# EAGLE board quantum_AnalougeEngine_V5_0 (EAGLE 9.5.2), part 1 of 2
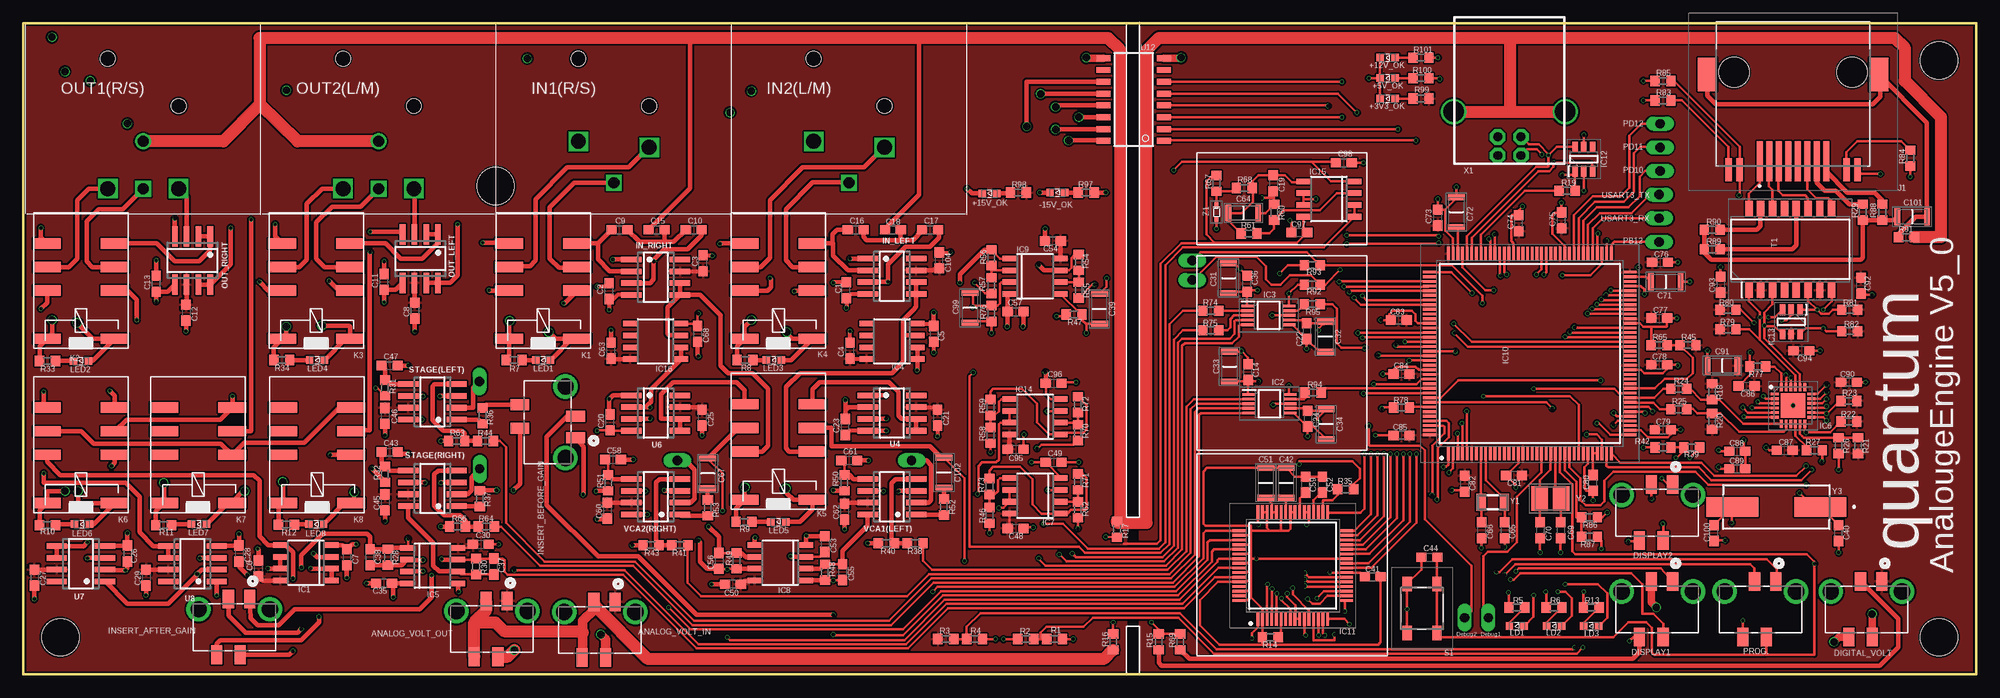
[diagram p0: board, top side]
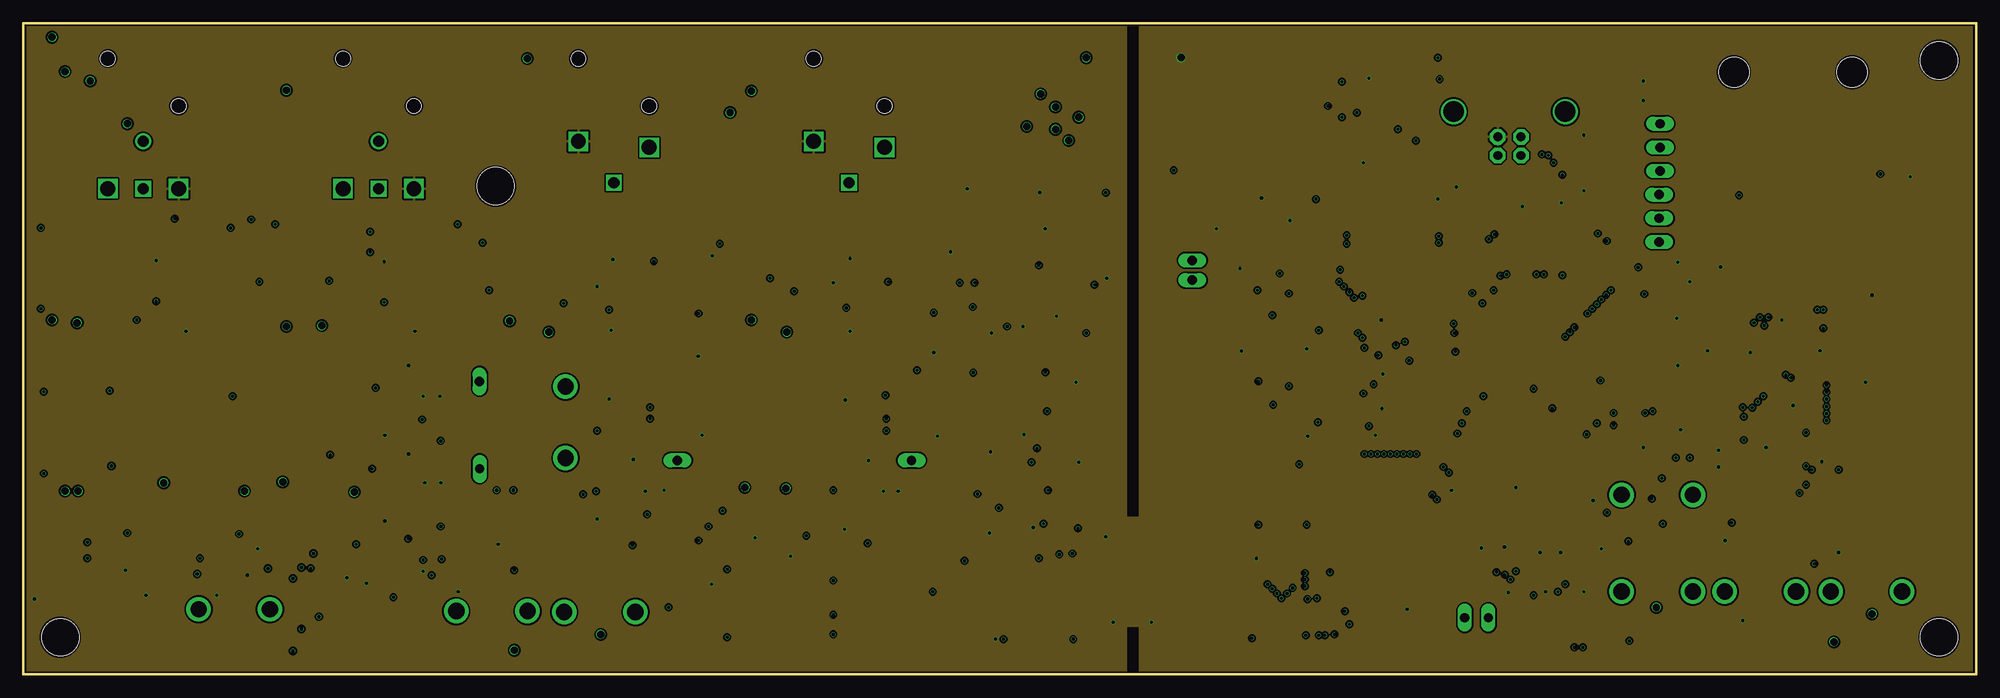
[diagram p1: board, inner layer midTop(AGND)]
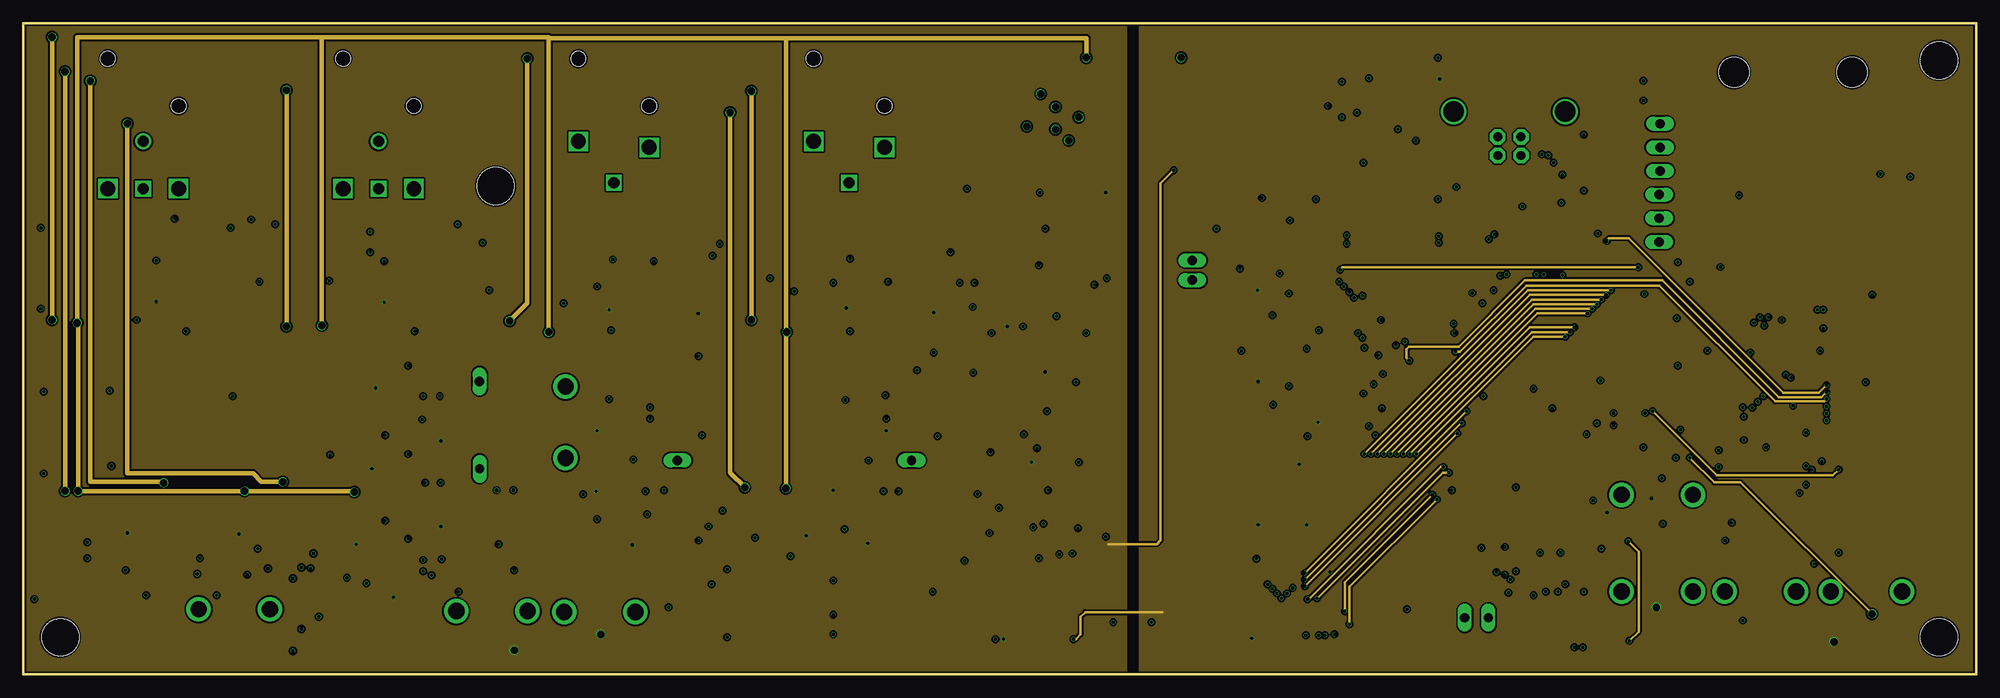
[diagram p2: board, inner layer midBottom(V-/+5V)]
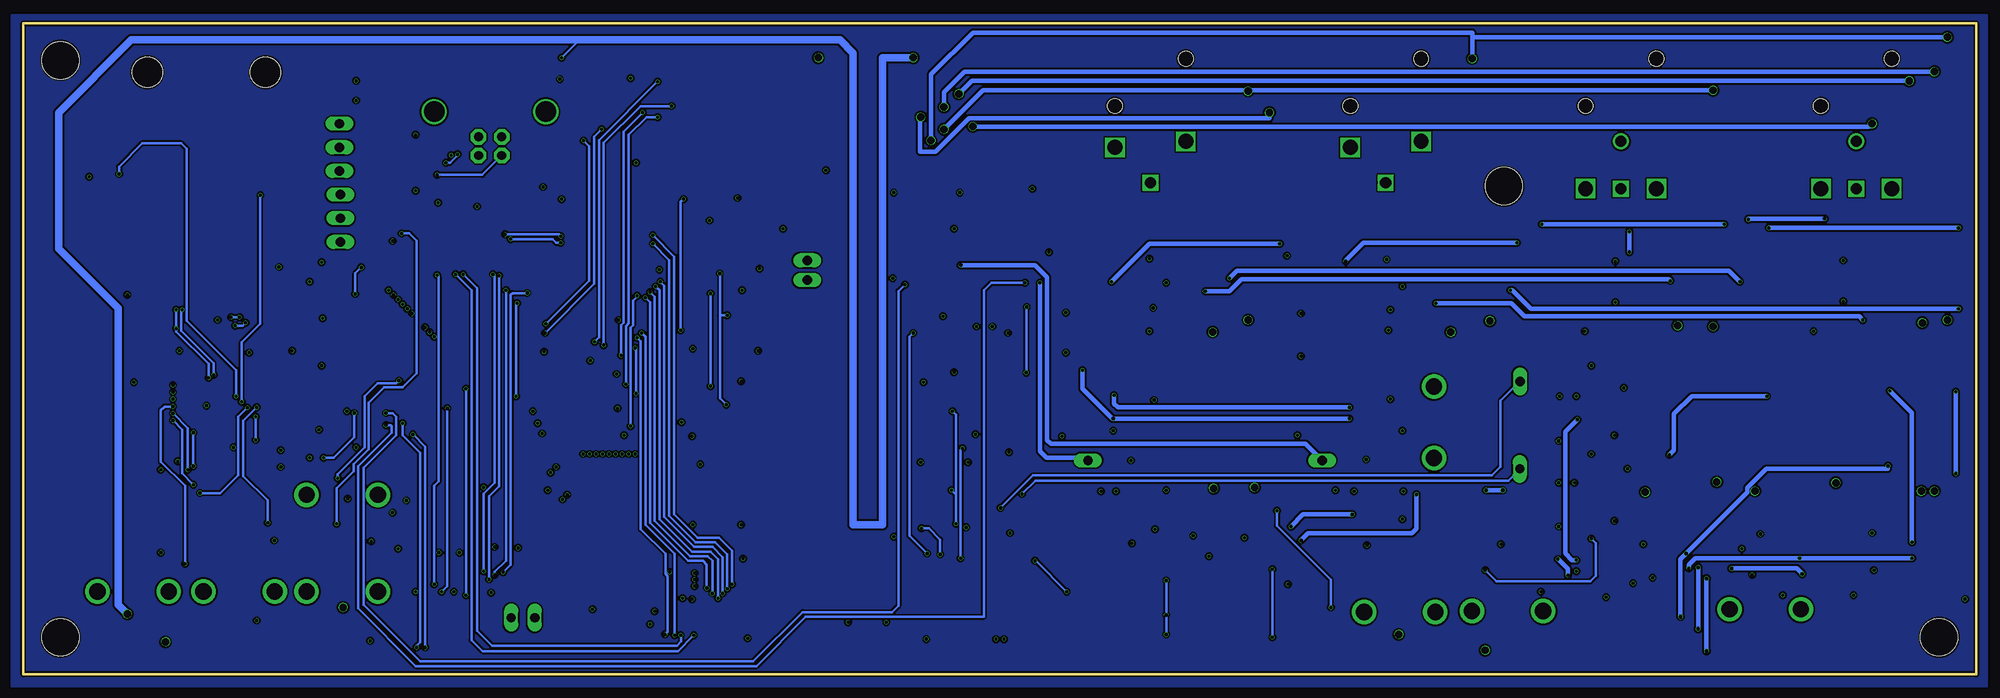
[diagram p3: board, bottom side, seen from below]

Size 210 x 70 mm. Coordinates in mm from the lower left corner, seen from the top.
Outline: 0,0 210,0 210,70 0,70 0,0
Copper layers (1*2+15*16): Top(V+/+3V3) 0.018mm / dielectric 0.362mm / midTop(AGND) 0.035mm / dielectric 0.71mm / midBottom(V-/+5V) 0.035mm / dielectric 0.362mm / Bottom 0.018mm
Design rules "4layer": minimum track width 0.2mm, minimum drill 0.2mm, track to track 0.2mm, track to pad 0.1mm, pad to pad 0.1mm, via to via 0.1mm, smd to smd 0.1mm, copper to edge 0.2mm, drill to drill 0.21mm, minimum pad ring 0.25mm, minimum via ring 0.05mm, stop-mask expansion 0.01mm, vias tented up to drill 0mil, thermal gap 10mil
Holes 4 mm at 206,66 50.8,52.5 4,4 206,4

## Footprints (pad centres in the part's own frame; a part is rotated, then mirrored left to right if it is on the bottom)
WL-SMCW_0603 = smd 0.8 x 0.8: 1 -0.8,0; 2 0.8,0
MOLEX_90814-0204 = smd 1.194 x 2.007: 1 0.254,0; 2 1.27,5.994; 3 2.54,0; 4 3.81,5.994 | drill 1.753 pad 2.629: 5 -1.93,1.092; 6 5.74,1.092
C0603 = smd 1.1 x 1: 1 -0.85,0; 2 0.85,0
C1206 = smd 0.62 x 1.82: 1 -1.6,0; 2 1.6,0
THT_PIN = drill 1 long: P$1 0,0
SOIC8 = smd 0.6 x 1.5: 1 -1.905,-2.75; 2 -0.635,-2.75; 3 0.635,-2.75; 4 1.905,-2.75; 5 1.905,2.75; 6 0.635,2.75; 7 -0.635,2.75; 8 -1.905,2.75
SOP50P490X110-10N = smd 1.4 x 0.3: 1 -2.2,1; 2 -2.2,0.5; 3 -2.2,0; 4 -2.2,-0.5; 5 -2.2,-1; 6 2.2,-1; 7 2.2,-0.5; 8 2.2,0; 9 2.2,0.5; 10 2.2,1
QFN50P400X400X100-25N = smd 0.85 x 0.3: 1 -1.95,1.25; 2 -1.95,0.75; 3 -1.95,0.25; 4 -1.95,-0.25; 5 -1.95,-0.75; 6 -1.95,-1.25; 13 1.95,-1.25; 14 1.95,-0.75; 15 1.95,-0.25; 16 1.95,0.25; 17 1.95,0.75; 18 1.95,1.25 | smd 0.3 x 0.85: 7 -1.25,-1.95; 8 -0.75,-1.95; 9 -0.25,-1.95; 10 0.25,-1.95; 11 0.75,-1.95; 12 1.25,-1.95; 19 1.25,1.95; 20 0.75,1.95; 21 0.25,1.95; 22 -0.25,1.95; 23 -0.75,1.95; 24 -1.25,1.95 | smd 2.6 x 2.6: 25 0,0
QFP50P2200X2200X160-144N = smd 1.475 x 0.3: 1 -10.738,8.75; 2 -10.738,8.25; 3 -10.738,7.75; 4 -10.738,7.25; 5 -10.738,6.75; 6 -10.738,6.25; 7 -10.738,5.75; 8 -10.738,5.25; 9 -10.738,4.75; 10 -10.738,4.25; 11 -10.738,3.75; 12 -10.738,3.25; 13 -10.738,2.75; 14 -10.738,2.25; 15 -10.738,1.75; 16 -10.738,1.25; 17 -10.738,0.75; 18 -10.738,0.25; 19 -10.738,-0.25; 20 -10.738,-0.75; 21 -10.738,-1.25; 22 -10.738,-1.75; 23 -10.738,-2.25; 24 -10.738,-2.75; 25 -10.738,-3.25; 26 -10.738,-3.75; 27 -10.738,-4.25; 28 -10.738,-4.75; 29 -10.738,-5.25; 30 -10.738,-5.75; 31 -10.738,-6.25; 32 -10.738,-6.75; 33 -10.738,-7.25; 34 -10.738,-7.75; 35 -10.738,-8.25; 36 -10.738,-8.75; 73 10.738,-8.75; 74 10.738,-8.25; 75 10.738,-7.75; 76 10.738,-7.25; 77 10.738,-6.75; 78 10.738,-6.25; 79 10.738,-5.75; 80 10.738,-5.25; 81 10.738,-4.75; 82 10.738,-4.25; 83 10.738,-3.75; 84 10.738,-3.25; 85 10.738,-2.75; 86 10.738,-2.25; 87 10.738,-1.75; 88 10.738,-1.25; 89 10.738,-0.75; 90 10.738,-0.25; 91 10.738,0.25; 92 10.738,0.75; 93 10.738,1.25; 94 10.738,1.75; 95 10.738,2.25; 96 10.738,2.75; 97 10.738,3.25; 98 10.738,3.75; 99 10.738,4.25; 100 10.738,4.75; 101 10.738,5.25; 102 10.738,5.75; 103 10.738,6.25; 104 10.738,6.75; 105 10.738,7.25; 106 10.738,7.75; 107 10.738,8.25; 108 10.738,8.75 | smd 0.3 x 1.475: 37 -8.75,-10.738; 38 -8.25,-10.738; 39 -7.75,-10.738; 40 -7.25,-10.738; 41 -6.75,-10.738; 42 -6.25,-10.738; 43 -5.75,-10.738; 44 -5.25,-10.738; 45 -4.75,-10.738; 46 -4.25,-10.738; 47 -3.75,-10.738; 48 -3.25,-10.738; 49 -2.75,-10.738; 50 -2.25,-10.738; 51 -1.75,-10.738; 52 -1.25,-10.738; 53 -0.75,-10.738; 54 -0.25,-10.738; 55 0.25,-10.738; 56 0.75,-10.738; 57 1.25,-10.738; 58 1.75,-10.738; 59 2.25,-10.738; 60 2.75,-10.738; 61 3.25,-10.738; 62 3.75,-10.738; 63 4.25,-10.738; 64 4.75,-10.738; 65 5.25,-10.738; 66 5.75,-10.738; 67 6.25,-10.738; 68 6.75,-10.738; 69 7.25,-10.738; 70 7.75,-10.738; 71 8.25,-10.738; 72 8.75,-10.738; 109 8.75,10.738; 110 8.25,10.738; 111 7.75,10.738; 112 7.25,10.738; 113 6.75,10.738; 114 6.25,10.738; 115 5.75,10.738; 116 5.25,10.738; 117 4.75,10.738; 118 4.25,10.738; 119 3.75,10.738; 120 3.25,10.738; 121 2.75,10.738; 122 2.25,10.738; 123 1.75,10.738; 124 1.25,10.738; 125 0.75,10.738; 126 0.25,10.738; 127 -0.25,10.738; 128 -0.75,10.738; 129 -1.25,10.738; 130 -1.75,10.738; 131 -2.25,10.738; 132 -2.75,10.738; 133 -3.25,10.738; 134 -3.75,10.738; 135 -4.25,10.738; 136 -4.75,10.738; 137 -5.25,10.738; 138 -5.75,10.738; 139 -6.25,10.738; 140 -6.75,10.738; 141 -7.25,10.738; 142 -7.75,10.738; 143 -8.25,10.738; 144 -8.75,10.738
QFP50P1200X1200X160-64N = smd 1.475 x 0.3: 1 -5.738,3.75; 2 -5.738,3.25; 3 -5.738,2.75; 4 -5.738,2.25; 5 -5.738,1.75; 6 -5.738,1.25; 7 -5.738,0.75; 8 -5.738,0.25; 9 -5.738,-0.25; 10 -5.738,-0.75; 11 -5.738,-1.25; 12 -5.738,-1.75; 13 -5.738,-2.25; 14 -5.738,-2.75; 15 -5.738,-3.25; 16 -5.738,-3.75; 33 5.738,-3.75; 34 5.738,-3.25; 35 5.738,-2.75; 36 5.738,-2.25; 37 5.738,-1.75; 38 5.738,-1.25; 39 5.738,-0.75; 40 5.738,-0.25; 41 5.738,0.25; 42 5.738,0.75; 43 5.738,1.25; 44 5.738,1.75; 45 5.738,2.25; 46 5.738,2.75; 47 5.738,3.25; 48 5.738,3.75 | smd 0.3 x 1.475: 17 -3.75,-5.738; 18 -3.25,-5.738; 19 -2.75,-5.738; 20 -2.25,-5.738; 21 -1.75,-5.738; 22 -1.25,-5.738; 23 -0.75,-5.738; 24 -0.25,-5.738; 25 0.25,-5.738; 26 0.75,-5.738; 27 1.25,-5.738; 28 1.75,-5.738; 29 2.25,-5.738; 30 2.75,-5.738; 31 3.25,-5.738; 32 3.75,-5.738; 49 3.75,5.738; 50 3.25,5.738; 51 2.75,5.738; 52 2.25,5.738; 53 1.75,5.738; 54 1.25,5.738; 55 0.75,5.738; 56 0.25,5.738; 57 -0.25,5.738; 58 -0.75,5.738; 59 -1.25,5.738; 60 -1.75,5.738; 61 -2.25,5.738; 62 -2.75,5.738; 63 -3.25,5.738; 64 -3.75,5.738
SOT95P280X145-6N = smd 1.15 x 0.6: 1 -1.3,0.95; 2 -1.3,0; 3 -1.3,-0.95; 4 1.3,-0.95; 5 1.3,0; 6 1.3,0.95
NEUTRIK_NC3FAH = drill 1.6 square: 1 -3.81,-12.7; 2 3.81,-13.335 | drill 1.2 square: 3 0,-17.15 | hole 1.6: -3.81,-3.81; 3.81,-8.89
SO08 = smd 0.6 x 2.2: 1 -1.905,-2.6; 2 -0.635,-2.6; 3 0.635,-2.6; 4 1.905,-2.6; 5 1.905,2.6; 6 0.635,2.6; 7 -0.635,2.6; 8 -1.905,2.6
GWLEXSMTS988GY = smd 0.61 x 4.3: 1 3.57,7.05; 2 2.55,7.05; 3 1.53,7.05; 4 0.51,7.05; 5 -0.51,7.05; 6 -1.53,7.05; 7 -2.55,7.05; 8 -3.57,7.05 | smd 0.7 x 2.5: 9 6.95,7.95; 10 5.74,7.95; 11 -5.74,7.95; 12 -6.95,7.95 | smd 2.032 x 3.6: MP1 -9.204,-2.3; MP2 9.204,-2.3 | hole 3.25: -6.35,-2.55; 6.35,-2.55
351 = smd 1.11 x 3: 1 -2.623,-3.645; 2 -2.623,3.645; P1 5.096,-3.645; P2 5.096,3.645; Q1 2.556,-3.645; Q2 2.556,3.645; S1 7.636,-3.645; S2 7.636,3.645
NEUTRIK_NC3MAH = drill 1.6 square: 1 3.81,-17.78; 2 -3.81,-17.78 | drill 1.2 square: 3 0,-17.78 | drill 1.2: G 0,-12.7 | hole 1.6: -3.81,-3.8; 3.81,-8.89
R0603 = smd 1 x 1.1: 1 -0.85,0; 2 0.85,0
PTS647SN50SMTR2LFS = smd 1.55 x 1: 1 -2.625,-1.6; 2 2.625,-1.6; 3 2.625,1.6; 4 -2.625,1.6
SOIC127P940X597-16N = smd 1.645 x 0.8: 1 -4.378,4.445; 2 -4.378,3.175; 3 -4.378,1.905; 4 -4.378,0.635; 5 -4.378,-0.635; 6 -4.378,-1.905; 7 -4.378,-3.175; 8 -4.378,-4.445; 9 4.378,-4.445; 10 4.378,-3.175; 11 4.378,-1.905; 12 4.378,-0.635; 13 4.378,0.635; 14 4.378,1.905; 15 4.378,3.175; 16 4.378,4.445
SOIC16 = smd 1.524 x 0.635: 1 -3.24,4.445; 2 -3.24,3.175; 3 -3.24,1.905; 4 -3.24,0.635; 5 -3.24,-0.635; 6 -3.24,-1.905; 7 -3.24,-3.175; 8 -3.24,-4.445; 9 3.24,-4.445; 10 3.24,-3.175; 11 3.24,-1.905; 12 3.24,-0.635; 13 3.24,0.635; 14 3.24,1.905; 15 3.24,3.175; 16 3.24,4.445
SMARTPRJ_PN61729 = drill 0.95 pad 1.676 octagon: 1 1.25,4.71; 2 -1.25,4.71; 3 -1.25,2.71; 4 1.25,2.71 | drill 2.2: P$1 -6,0; P$2 6,0
NX3215SA = smd 1 x 1.8: 1 -1.25,0; 2 1.25,0
RESC3226X100N = smd 1.75 x 2.65: 1 -1.15,0; 2 1.15,0
ABLS = smd 5.6 x 2.1: 1 -4.75,0; 2 4.75,0
SODFL1608X65N = smd 0.57 x 0.42: 1 -0.775,0; 2 0.775,0

## Placement (x,y rotation side)
+3V3_OK  LED_GREEN_SMD  [WL-SMCW_0603]  146.7,61.9 0 top
+5V_OK  LED_GREEN_SMD  [WL-SMCW_0603]  146.7,64.1 0 top
+12V_OK  LED_GREEN_SMD  [WL-SMCW_0603]  146.7,66.3 0 top
+15V_OK  LED_GREEN_SMD  [WL-SMCW_0603]  103.9,51.7 0 top
-15V_OK  LED_GREEN_SMD  [WL-SMCW_0603]  111.2,51.8 0 top
ANALOG_VOLT_IN  90814-0204  [MOLEX_90814-0204]  63.9,7.8 180 top
ANALOG_VOLT_OUT  90814-0204  [MOLEX_90814-0204]  52.3,7.9 180 top
C1  100 nF  [C0603]  88.5,41.3 90 top
C2  100 nF  [C0603]  63,41.2 90 top
C3  100 nF  [C0603]  73.1,44.2 90 top
C4  100 nF  [C0603]  88.9,34.8 90 top
C5  100 nF  [C0603]  97.9,36.6 270 top
C6  100 nF  [C0603]  25.3,11.4 90 top
C7  100 nF  [C0603]  34.8,12.6 270 top
C8  100 nF  [C0603]  42.1,39.1 270 top
C9  470 pF  [C0603]  64.1,47.8 0 top
C10  470 pF  [C0603]  72.1,47.8 0 top
C11  100 nF  [C0603]  38.8,42.2 90 top
C12  100 nF  [C0603]  17.5,38.9 270 top
C13  100 nF  [C0603]  14.3,42 90 top
C14  100 nF  [C0603]  131.7,32.5 90 top
C15  47 pF  [C0603]  68.1,47.8 0 top
C16  470 pF  [C0603]  89.5,47.8 0 top
C17  470 pF  [C0603]  97.5,47.8 0 top
C18  47 pF  [C0603]  93.5,47.8 0 top
C19  100 nF  [C0603]  134.4,52.8 270 top
C20  100 nF  [C0603]  63.1,27.1 90 top
C21  100 nF  [C0603]  98.3,27.6 270 top
C22  100 nF  [C0603]  138,36.9 270 top
C23  100 nF  [C0603]  88.4,26.6 90 top
C24  100 nF  [C0603]  138.1,27.5 270 top
C25  100 nF  [C0603]  73,27.6 270 top
C26  100 nF  [C0603]  11.2,13 270 top
C27  100 nF  [C0603]  1.2,10.4 270 top
C28  100 nF  [C0603]  23.2,13 270 top
C29  100 nF  [C0603]  13.2,10.4 270 top
C30  100 nF  [C0603]  49.2,14 0 top
C31  10 uF  [C1206]  129.6,42.6 90 top
C32  10 uF  [C1206]  140,36.3 270 top
C33  10 uF  [C1206]  129.7,33.1 90 top
C34  10 uF  [C1206]  140.1,26.9 270 top
C35  100 nF  [C0603]  38.8,9.8 180 top
C36  100 nF  [C0603]  131.6,42 90 top
C37  22 pF  [C0603]  50.6,11.6 90 top
C38  22 pF  [C0603]  37.3,12.6 90 top
C39  10 uF  [C1206]  115.7,39.3 90 top
C40  30 pF  [C0603]  195.2,15.2 90 top
C41  100 nF  [C0603]  145.1,10.5 0 top
C42  10 uF  [C1206]  133.6,20.6 90 top
C43  100 nF  [C0603]  39.4,23.9 0 top
C44  100 nF  [C0603]  151.2,12.6 0 top
C45  100 nF  [C0603]  38.9,18.5 270 top
C46  100 nF  [C0603]  38.9,27.8 270 top
C47  100 nF  [C0603]  39.4,33.2 0 top
C48  100 nF  [C0603]  106.7,15.7 0 top
C49  100 nF  [C0603]  110.8,22.8 0 top
C50  100 nF  [C0603]  76.3,9.7 180 top
C51  10 uF  [C1206]  135.8,20.6 90 top
C52  1 uF  [C0603]  139.7,20.4 90 top
C53  100 nF  [C0603]  86.2,14 270 top
C54  100 nF  [C0603]  110.7,46.6 180 top
C55  22 pF  [C0603]  88.1,11 270 top
C56  22 pF  [C0603]  74.8,12.2 270 top
C57  100 nF  [C0603]  106.7,39 0 top
C58  100 nF  [C0603]  63.4,23.1 0 top
C59  1 uF  [C0603]  137.9,20.4 90 top
C60  100 nF  [C0603]  62.8,17.6 270 top
C61  100 nF  [C0603]  88.8,23 0 top
C62  100 nF  [C0603]  88.3,17.5 270 top
C63  100 nF  [C0603]  63.2,34.8 90 top
C64  10 uF  [C1206]  131.2,49.6 0 top
C65  2.7 pF  [C0603]  159.3,15.5 270 top
C66  2.7 pF  [C0603]  156.8,15.5 270 top
C67  10 uF  [C1206]  73.6,21.6 270 top
C68  100 nF  [C0603]  72.5,36.6 270 top
C69  4.3 pF  [C0603]  165.3,15.5 270 top
C70  4.3 pF  [C0603]  163.1,15.5 270 top
C71  2.2 uF  [C1206]  176.6,42.2 0 top
C72  2.2 uF  [C1206]  154.1,49.7 90 top
C73  100 nF  [C0603]  152.1,49.1 90 top
C74  100 nF  [C0603]  160.8,48.5 90 top
C75  100 nF  [C0603]  165.4,48.8 90 top
C76  100 nF  [C0603]  176,44.3 0 top
C77  100 nF  [C0603]  175.9,38.3 0 top
C78  100 nF  [C0603]  175.9,33.3 0 top
C79  100 nF  [C0603]  176.3,26.3 0 top
C80  100 nF  [C0603]  168.8,20.6 90 top
C81  100 nF  [C0603]  160.3,21.4 0 top
C82  100 nF  [C0603]  155,20.5 90 top
C83  100 nF  [C0603]  147.9,38.1 180 top
C84  100 nF  [C0603]  148.2,32.3 180 top
C85  100 nF  [C0603]  148.2,25.7 180 top
C86  100 nF  [C0603]  185.3,31 0 top
C87  100 nF  [C0603]  189.4,24.1 0 top
C88  1 uF  [C0603]  184.3,24 0 top
C89  470 pF  [C0603]  184.3,22.1 0 top
C90  100 nF  [C0603]  196.3,31.4 180 top
C91  10 uF  [C1206]  182.7,33.2 180 top
C92  100 nF  [C0603]  197.6,41.8 90 top
C93  100 nF  [C0603]  182.5,41.9 270 top
C94  100 nF  [C0603]  191.2,34.8 180 top
C95  100 nF  [C0603]  106.7,24.2 0 top
C96  100 nF  [C0603]  110.8,31.3 0 top
C97  100 nF  [C0603]  137.2,47.5 180 top
C98  100 nF  [C0603]  142,55 0 top
C99  10 uF  [C1206]  101.8,39.4 270 top
C100  30 pF  [C0603]  181.8,15.2 90 top
C101  4.7 uF  [C1206]  203.1,49.2 0 top
C102  10 uF  [C1206]  99,21.7 270 top
C104  100 nF  [C0603]  98.5,44.5 90 top
DEBUG1  TPTHT  [THT_PIN]  157.54,6.1 90 top
DEBUG2  TPTHT  [THT_PIN]  155,6.1 90 top
DIGITAL_VOLT  90814-0204  [MOLEX_90814-0204]  200.1,10 180 top
DISPLAY1  90814-0204  [MOLEX_90814-0204]  177.6,10 180 top
DISPLAY2  90814-0204  [MOLEX_90814-0204]  177.6,20.4 180 top
IC1  OP275  [SOIC8]  30.4,12 90 top
IC2  DAC084S085CIMM_NOPB  [SOP50P490X110-10N]  134,29.1 0 top
IC3  DAC084S085CIMM_NOPB  [SOP50P490X110-10N]  133.9,38.6 0 top
IC4  OP275  [SOIC8]  93.4,35.8 90 top
IC5  OP275  [SOIC8]  44,11.7 270 top
IC6  LAN8742A-CZ-TR  [QFN50P400X400X100-25N]  190.3,28.9 0 top
IC7  TL072  [SOIC8]  108.8,19.2 90 top
IC8  OP275  [SOIC8]  81.4,12 90 top
IC9  TL072  [SOIC8]  108.8,42.8 270 top
IC10  STM32F767ZIT6  [QFP50P2200X2200X160-144N]  162,34.5 90 top
IC11  AD7606BSTZ  [QFP50P1200X1200X160-64N]  136.5,11.7 90 top
IC12  ESDA6V1BC6  [SOT95P280X145-6N]  167.8,55.4 90 top
IC13  USBLC6-4SC6  [SOT95P280X145-6N]  190.1,37.9 270 top
IC14  TL072  [SOIC8]  108.8,27.7 90 top
IC15  TL072  [SOIC8]  140.4,51.1 90 top
IC16  OP275  [SOIC8]  68,35.8 90 top
IN1(R/S)  NEUTRIK_NC3FAH  [NEUTRIK_NC3FAH]  63.5,70 0 top
IN2(L/M)  NEUTRIK_NC3FAH  [NEUTRIK_NC3FAH]  88.8,70 0 top
IN_LEFT  THAT1240  [SO08]  93.4,42.8 270 top
IN_RIGHT  THAT1240  [SO08]  68,42.7 270 top
INSERT_AFTER_GAIN  90814-0204  [MOLEX_90814-0204]  24.6,8.1 180 top
INSERT_BEFORE_GAIN  90814-0204  [MOLEX_90814-0204]  59.4,25.2 90 top
J1  GWLEX-SMT-S988G_Y  [GWLEXSMTS988GY]  190.3,62.2 180 top
K1  Relay  [351]  55.9,38.7 90 top
K2  Relay  [351]  6.2,38.7 90 top
K3  Relay  [351]  31.5,38.7 90 top
K4  Relay  [351]  81.2,38.7 90 top
K5  Relay  [351]  81.2,21.4 90 top
K6  Relay  [351]  6.2,21.05 90 top
K7  Relay  [351]  18.8,21.05 90 top
K8  Relay  [351]  31.6,21.05 90 top
LD1  LED_YELOW_SMD  [WL-SMCW_0603]  160.6,5.2 0 top
LD2  LED_RED_SMD  [WL-SMCW_0603]  164.6,5.2 0 top
LD3  LED_GREEN_SMD  [WL-SMCW_0603]  168.6,5.2 0 top
LED1  LED_BLUE_SMD  [WL-SMCW_0603]  55.9,33.8 0 top
LED2  LED_BLUE_SMD  [WL-SMCW_0603]  6.2,33.7 0 top
LED3  LED_BLUE_SMD  [WL-SMCW_0603]  80.7,33.8 0 top
LED4  LED_BLUE_SMD  [WL-SMCW_0603]  31.6,33.8 0 top
LED5  LED_BLUE_SMD  [WL-SMCW_0603]  81.2,16.4 0 top
LED6  LED_BLUE_SMD  [WL-SMCW_0603]  6.3,16.15 0 top
LED7  LED_BLUE_SMD  [WL-SMCW_0603]  18.9,16.15 0 top
LED8  LED_BLUE_SMD  [WL-SMCW_0603]  31.5,16.15 0 top
OUT1(R/S)  NEUTRIK_NC3MAH  [NEUTRIK_NC3MAH]  12.9,70 0 top
OUT2(L/M)  NEUTRIK_NC3MAH  [NEUTRIK_NC3MAH]  38.2,70 0 top
OUT_LEFT  THAT1646  [SO08]  42.7,44.7 180 top
OUT_RIGHT  THAT1646  [SO08]  18.2,44.5 180 top
PROG.  90814-0204  [MOLEX_90814-0204]  188.7,10 180 top
R1  10 k  [R0603]  110.9,3.8 0 top
R2  100 k  [R0603]  107.8,3.8 0 top
R3  100 k  [R0603]  99.2,3.8 180 top
R4  10 k  [R0603]  102.3,3.8 180 top
R5  680 R  [R0603]  160.6,7.2 0 top
R6  680 R  [R0603]  164.6,7.2 0 top
R7  680 R  [R0603]  52.8,33.8 0 top
R8  680 R  [R0603]  77.6,33.8 0 top
R9  680 R  [R0603]  77.5,16.4 0 top
R10  680 R  [R0603]  2.6,16.05 0 top
R11  680 R  [R0603]  15.1,16.05 0 top
R12  680 R  [R0603]  28.3,16.1 0 top
R13  680 R  [R0603]  168.6,7.2 0 top
R14  10 k  [R0603]  134.1,4 180 top
R15  0 R  [R0603]  122.1,3.5 90 top
R16  0 R  [R0603]  117.2,3.5 90 top
R17  0 R  [R0603]  117.6,15.6 270 top
R18  10 k  [R0603]  181.6,30.4 270 top
R19  10 k  [R0603]  166,52 0 top
R20  10 k  [R0603]  181.6,27.2 90 top
R21  10 k  [R0603]  197.3,24.6 90 top
R22  1k5  [R0603]  196.3,27.2 180 top
R23  10 k  [R0603]  196.3,29.4 0 top
R24  33 R  [R0603]  178,30.7 0 top
R25  33 R  [R0603]  178,28.5 0 top
R26  33 R  [R0603]  195.2,24.6 90 top
R27  10 k  [R0603]  192.6,24.1 180 top
R28  20 k  [R0603]  39.2,12.6 90 top
R29  75 R  [R0603]  197.8,49.7 90 top
R30  20 k  [R0603]  48.7,11.6 90 top
R31  5k1  [R0603]  38.9,30.8 90 top
R32  5k1  [R0603]  38.9,21.5 90 top
R33  680 R  [R0603]  2.6,33.7 0 top
R34  680 R  [R0603]  27.8,33.8 0 top
R35  10 k  [R0603]  142.2,19.9 180 top
R36  20 k  [R0603]  49.4,27.8 270 top
R37  20 k  [R0603]  49.1,18.9 270 top
R38  27 k  [R0603]  95.9,14.1 0 top
R39  100 k  [R0603]  179.4,24.4 0 top
R40  160 k  [R0603]  92.8,14.1 0 top
R41  27 k  [R0603]  70.6,13.9 0 top
R42  10 k  [R0603]  176.3,24.4 0 top
R43  160 k  [R0603]  67.5,13.9 0 top
R44  27 k  [R0603]  49.7,25.1 0 top
R45  100 k  [R0603]  179,35.4 0 top
R46  10 k  [R0603]  103.9,17.1 90 top
R47  1k8  [R0603]  113,38.7 0 top
R48  20 k  [R0603]  86.2,11 270 top
R49  20 k  [R0603]  76.7,12.2 270 top
R50  5k1  [R0603]  88.3,20.6 90 top
R51  5k1  [R0603]  62.9,20.6 90 top
R52  20 k  [R0603]  99,18 270 top
R53  20 k  [R0603]  73.6,17.9 270 top
R54  10 k  [R0603]  113.5,44.3 90 top
R55  10 k  [R0603]  113.5,41.3 90 top
R56  10 k  [R0603]  104.1,44.8 90 top
R57  10 k  [R0603]  104.1,41.8 90 top
R58  10 k  [R0603]  104,25.7 90 top
R59  56 k  [R0603]  104,28.7 90 top
R60  10 k  [R0603]  134.5,49.7 270 top
R61  10 k  [R0603]  131.8,47.4 180 top
R62  10 k  [R0603]  113.4,17.7 90 top
R63  160 k  [R0603]  46.6,25.1 0 top
R64  27 k  [R0603]  49.8,15.9 0 top
R65  10 k  [R0603]  175.9,35.4 0 top
R66  160 k  [R0603]  46.7,15.9 0 top
R67  10 k  [R0603]  128.3,52.8 90 top
R68  20 k  [R0603]  131.3,52.3 180 top
R69  0 R  [R0603]  124.4,3.5 90 top
R70  10 k  [R0603]  113.4,26 90 top
R71  10 k  [R0603]  113.4,20.7 90 top
R72  10 k  [R0603]  113.4,29 90 top
R73  56 k  [R0603]  103.9,20.2 90 top
R74  10 k  [R0603]  127.7,39.1 180 top
R75  10 k  [R0603]  127.7,37 180 top
R76  1k8  [R0603]  104.1,38.8 90 top
R77  12k1  [R0603]  186.5,33.1 180 top
R78  10 k  [R0603]  148.2,28.7 180 top
R79  50 R  [R0603]  183.3,37.1 180 top
R80  50 R  [R0603]  183.3,39.2 180 top
R81  50 R  [R0603]  196.4,39.2 0 top
R82  50 R  [R0603]  196.4,36.9 0 top
R83  270 R  [R0603]  176.3,61.7 0 top
R84  270 R  [R0603]  202.9,55.5 90 top
R85  10 k  [R0603]  176.3,63.8 0 top
R86  100 k  [R0603]  168.4,16.9 0 top
R87  10 k  [R0603]  168.4,14.8 180 top
R88  75 R  [R0603]  199.9,49.7 90 top
R89  75 R  [R0603]  181.6,45.7 0 top
R90  75 R  [R0603]  181.6,47.8 0 top
R91  0 R  [R0603]  202.5,47 180 top
R92  500 R  [R0603]  138.6,41.9 0 top
R93  500 R  [R0603]  138.6,44 0 top
R94  500 R  [R0603]  138.7,30.3 0 top
R95  500 R  [R0603]  138.6,39.8 0 top
R97  680 R  [R0603]  114.3,51.8 180 top
R98  680 R  [R0603]  107,51.8 0 top
R99  65 R  [R0603]  150.3,61.9 0 top
R100  150 R  [R0603]  150.3,64.1 0 top
R101  500 R  [R0603]  150.3,66.3 0 top
S1  PTS647SN50SMTR2LFS  [PTS647SN50SMTR2LFS]  150.4,7.1 270 top
STAGE(LEFT)  THAT2181SO8-US  [SO08]  44,29.3 90 top
STAGE(RIGHT)  THAT2181SO8-US  [SO08]  44,20 90 top
T1  H1102NL  [SOIC127P940X597-16N]  190,45.7 90 top
TP01  TPTHT  [THT_PIN]  49.08,22.1 270 top
TP02  TPTHT  [THT_PIN]  49.06,31.5 270 top
TP03  TPTHT  [THT_PIN]  125.7,42.4 0 top
TP04  TPTHT  [THT_PIN]  125.7,44.5 0 top
TP05  TPTHT  [THT_PIN]  175.9,46.5 0 top
TP06  TPTHT  [THT_PIN]  175.9,49.04 0 top
TP07  TPTHT  [THT_PIN]  175.9,51.58 0 top
TP08  TPTHT  [THT_PIN]  176,54.12 0 top
TP09  TPTHT  [THT_PIN]  176,56.66 0 top
TP10  TPTHT  [THT_PIN]  176,59.2 0 top
TP36  TPTHT  [THT_PIN]  70.34,23 180 top
TP37  TPTHT  [THT_PIN]  95.52,23 180 top
U4  THAT1240  [SO08]  93.4,28.1 270 top
U6  THAT1240  [SO08]  68,28.1 270 top
U7  THAT1240  [SO08]  6.2,11.9 90 top
U8  THAT1240  [SO08]  18.2,11.9 90 top
U12  ULN2003  [SOIC16]  119.4,61.8 180 top
VCA1(LEFT)  THAT2181SO8-US  [SO08]  93.4,19.1 90 top
VCA2(RIGHT)  THAT2181SO8-US  [SO08]  68,19.1 90 top
X1  [SMARTPRJ_PN61729]  159.8,60.5 180 top
Y1  NX3215SA-32.768K-STD-MUA-8  [NX3215SA]  158,18.5 0 top
Y2  NX3225GD-8MHZ-STD-CRA-3  [RESC3226X100N]  164.2,18.9 0 top
Y3  ABLS2-25.000MHZ-D4YF-T  [ABLS]  188.5,18 180 top
Z1  ZENER_DIODE_BZT  [SODFL1608X65N]  128.3,49.7 270 top

## Library data of the parts
+3V3_OK +5V_OK +12V_OK +15V_OK -15V_OK LD1-LD3 LED1-LED8 = passive components; MOUSER_PART_NUMBER: ...
ANALOG_VOLT_IN ANALOG_VOLT_OUT DIGITAL_VOLT DISPLAY1 DISPLAY2 INSERT_AFTER_GAIN INSERT_BEFORE_GAIN PROG. = electro_mechanical; DESCRIPTION: CONN HEADER 4POS 1.27MM SMD TIN; HEIGHT: mm; MANUFACTURER_NAME: Molex; MANUFACTURER_PART_NUMBER: 90814-0204; MOUSER_PART_NUMBER: 538-90814-0204; MOUSER_PRICE-STOCK: https://www.mouser.com/Search/Refine.aspx?Keyword=538-90814-0204
C1-C102 C104 R1-R95 R97-R101 = passive components
DEBUG1 DEBUG2 IC1 IC4 IC5 IC7-IC9 IC14-IC16 IN1(R/S) IN2(L/M) K1-K4 K7 K8 OUT1(R/S) OUT2(L/M) TP01-TP09 TP10 TP36 TP37 U12 = C_Sager_Bibliothek
IC2 IC3 = SPI; MOUSER_PART_NUMBER: 926-DAC084S085CIMMNO
IC6 = NUCLEO_parts; DESCRIPTION: Ethernet ICs; HEIGHT: 1mm; MANUFACTURER_NAME: Microchip; MANUFACTURER_PART_NUMBER: LAN8742A-CZ-TR; MOUSER_PART_NUMBER: 579-LAN8742A-CZ-TR; MOUSER_PRICE-STOCK: https://www.mouser.com/Search/Refine.aspx?Keyword=579-LAN8742A-CZ-TR
IC10 = NUCLEO_parts; DESCRIPTION: STMICROELECTRONICS - STM32F767ZIT6 - MCU, 32BIT, CORTEX-M7, 216MHZ, LQFP-144; HEIGHT: 1.6mm; MANUFACTURER_NAME: STMicroelectronics; MANUFACTURER_PART_NUMBER: STM32F767ZIT6; MOUSER_PART_NUMBER: 511-STM32F767ZIT6; MOUSER_PRICE-STOCK: https://www.mouser.com/Search/Refine.aspx?Keyword=511-STM32F767ZIT6
IC11 = C_Sager_Bibliothek; DESCRIPTION: Bipolar Input, Simultaneous Sampling ADC; HEIGHT: 1.6mm; MANUFACTURER_NAME: Analog Devices; MANUFACTURER_PART_NUMBER: AD7606BSTZ; MOUSER_PART_NUMBER: 584-AD7606BSTZ; MOUSER_PRICE-STOCK: https://www.mouser.com/Search/Refine.aspx?Keyword=584-AD7606BSTZ
IC12 = NUCLEO_parts; DESCRIPTION: TVS Diode Array Bi-Directional ESDA6V1BC6 Quad, 80W, SOT-23 6-Pin; HEIGHT: 1.45mm; MANUFACTURER_NAME: STMicroelectronics; MANUFACTURER_PART_NUMBER: ESDA6V1BC6; MOUSER_PART_NUMBER: 511-ESDA6V1BC6; MOUSER_PRICE-STOCK: https://www.mouser.com/Search/Refine.aspx?Keyword=511-ESDA6V1BC6
IC13 = NUCLEO_parts; DESCRIPTION: TVS Diode Array Uni-Directional USBLC6-4SC6 17V, SOT-23 6-Pin; HEIGHT: 1.45mm; MANUFACTURER_NAME: STMicroelectronics; MANUFACTURER_PART_NUMBER: USBLC6-4SC6; MOUSER_PART_NUMBER: 511-USBLC6-4SC6; MOUSER_PRICE-STOCK: https://www.mouser.com/Search/Refine.aspx?Keyword=511-USBLC6-4SC6
IN_LEFT IN_RIGHT U4 U6-U8 = THAT_Library; MOUSER_PART_NUMBER: 887-1240S08-U
J1 = electro_mechanical; DESCRIPTION: SMT MODULAR JACK; HEIGHT: 13.3mm; MANUFACTURER_NAME: Kycon; MANUFACTURER_PART_NUMBER: GWLEX-SMT-S988G/Y; MOUSER_PART_NUMBER: 806-GWLEX-SMT-S988GY; MOUSER_PRICE-STOCK: https://www.mouser.com/Search/Refine.aspx?Keyword=806-GWLEX-SMT-S988GY
K5 K6 = C_Sager_Bibliothek; SPICEPREFIX: B
OUT_LEFT OUT_RIGHT = THAT_Library; MOUSER_PART_NUMBER: 887-1646S08-U
S1 = NUCLEO_parts; DESCRIPTION: Tactile Switches 50mA 12VDC, 1.0N 5.0mm H, G leads; HEIGHT: 5mm; MANUFACTURER_NAME: C & K COMPONENTS; MANUFACTURER_PART_NUMBER: PTS647SN50SMTR2LFS; MOUSER_PART_NUMBER: 611-PTS647SN50SMTR2L; MOUSER_PRICE-STOCK: https://www.mouser.com/Search/Refine.aspx?Keyword=611-PTS647SN50SMTR2L
STAGE(LEFT) STAGE(RIGHT) VCA1(LEFT) VCA2(RIGHT) = THAT_Library; MOUSER_PART_NUMBER: 887-2181CS08-U
T1 = NUCLEO_parts; DESCRIPTION: PULSE ELECTRONICS - H1102NL - TRANSFORMER, 1:1, 1PORT, 100BASE-TX, SMT; HEIGHT: 5.97mm; MANUFACTURER_NAME: Pulse; MANUFACTURER_PART_NUMBER: H1102NL; MOUSER_PART_NUMBER: 673-H1102NL; MOUSER_PRICE-STOCK: https://www.mouser.com/Search/Refine.aspx?Keyword=673-H1102NL
X1 = NUCLEO_parts; MOUSER_PART_NUMBER: 649-61729-0010BLF
Y1 = NUCLEO_parts; DESCRIPTION: Crsytal unit for OA/AV/Mobile communications/Automotive; HEIGHT: mm; MANUFACTURER_NAME: NDK; MANUFACTURER_PART_NUMBER: NX3215SA-32.768K-STD-MUA-8; MOUSER_PART_NUMBER: 344-NX3215SA32768K8; MOUSER_PRICE-STOCK: https://www.mouser.com/Search/Refine.aspx?Keyword=344-NX3215SA32768K8
Y2 = NUCLEO_parts; DESCRIPTION: A small surface-mount type crystal unit, ideal for an engine control CPU clock; delivering the high reliability that is particularly demanded by automotive; HEIGHT: 1mm; MANUFACTURER_NAME: NDK; MANUFACTURER_PART_NUMBER: NX3225GD-8MHZ-STD-CRA-3; MOUSER_PART_NUMBER: 344-NX3225GD8MCRA3; MOUSER_PRICE-STOCK: https://www.mouser.com/Search/Refine.aspx?Keyword=344-NX3225GD8MCRA3
Y3 = NUCLEO_parts; DESCRIPTION: ABRACON - ABLS2-25.000MHZ-D4YF-T - CRYSTAL, 25MHZ, 18PF, HC-49US; HEIGHT: mm; MANUFACTURER_NAME: ABRACON; MANUFACTURER_PART_NUMBER: ABLS2-25.000MHZ-D4YF-T; MOUSER_PART_NUMBER: 815-ABLS2-25-D4YF-T; MOUSER_PRICE-STOCK: https://www.mouser.com/Search/Refine.aspx?Keyword=815-ABLS2-25-D4YF-T
Z1 = passive components; DESCRIPTION: Diodes Inc BZT52C2V0T-7 Zener Diode, 2.4V 5% 300 mW SMT 2-Pin SOD-523; MOUSER_PART_NUMBER: 621-BZT52C2V0T-7

## Nets
0,5V_DAC: IC7.3 IC14.3 IC15.1 IC15.2
1V_DAC: C22.1 C32.1 IC3.7 IC15.6 IC15.7
1V_DAC_UNBUFFERD: C19.1 C64.1 IC15.5 R61.2 R68.1
2V_DAC_REF: R67.1 R68.2 Z1.1
8MHZ_CRYSTAL_A: C70.1 IC10.23 Y2.1
8MHZ_CRYSTAL_B: C69.1 IC10.24 Y2.2
32.768KHZ_A: C66.1 IC10.8 Y1.1
32.768KHZ_B: C65.1 IC10.9 Y1.2
+3V3: C73.1 C74.1 C75.1 C76.1 C77.1 C78.1 C79.1 C81.2 C82.2 C83.1 C84.1 C85.1 C86.2 C87.2 C90.2 C91.1 C92.2 C93.2 C94.2 DIGITAL_VOLT.1 IC6.1 IC6.9 IC6.19 IC10.6 IC10.17 IC10.30 IC10.39 IC10.52 IC10.62 IC10.72 IC10.84 IC10.95 IC10.108 IC10.121 IC10.131 IC10.144 IC13.5 R18.1 R20.1 R21.1 R22.1 R23.2 R45.2 R79.2 R80.2 R81.2 R82.2 R99.2 T1.2 T1.7
+3V3_SIG: IC10.47 R45.1 R65.2
+5V: C14.1 C24.1 C31.1 C33.1 C34.1 C36.1 C41.1 DIGITAL_VOLT.4 DISPLAY1.3 DISPLAY2.3 IC2.1 IC2.7 IC3.1 IC11.1 IC11.23 IC11.37 IC11.38 IC11.48 R1.2 R35.1 R86.2 R100.2
+5V_SIG: IC10.26 R86.1 R87.2
+12V: DIGITAL_VOLT.2 K1.1 K2.1 K3.1 K4.1 K5.1 K6.1 K7.1 K8.1 LED1.2 LED2.2 LED3.2 LED4.2 LED5.2 LED6.2 LED7.2 LED8.2 R39.2 R101.2 U12.9
+12V_SIG: IC10.42 R39.1 R42.2
+15V_SIG: IC10.34 R3.1 R4.2
-15V_SIG: IC10.37 R1.1 R2.2
.: IC14.1 R59.2 R72.2
...: IC7.1 R71.2 R73.2
A_GND_TO_STAR: ANALOG_VOLT_IN.3 ANALOG_VOLT_IN.4 ANALOG_VOLT_OUT.3 ANALOG_VOLT_OUT.4 R16.1
AGND: +3V3_OK.1 +5V_OK.1 +12V_OK.1 +15V_OK.1 -15V_OK.1 C1.2 C2.2 C3.2 C4.2 C5.2 C6.2 C7.2 C8.2 C11.2 C12.2 C13.2 C14.2 C19.2 C20.2 C21.2 C22.2 C23.2 C24.2 C25.2 C26.2 C27.2 C28.2 C29.2 C30.2 C31.2 C32.2 C33.2 C34.2 C35.2 C36.2 C39.2 C40.1 C41.2 C42.2 C43.2 C44.1 C45.2 C46.2 C47.2 C48.2 C49.2 C50.2 C51.2 C52.2 C53.2 C54.2 C57.2 C58.2 C59.2 C60.2 C61.2 C62.2 C63.2 C64.2 C65.2 C66.2 C68.2 C69.2 C70.2 C71.2 C72.2 C73.2 C74.2 C75.2 C76.2 C77.2 C78.2 C79.2 C80.1 C81.1 C82.1 C83.2 C84.2 C85.2 C86.1 C87.1 C88.1 C89.1 C90.1 C91.2 C92.1 C93.1 C94.1 C95.2 C96.2 C97.2 C98.2 C99.2 C100.1 C104.2 IC2.6 IC3.6 IC5.3 IC5.5 IC6.25 IC8.3 IC8.5 IC10.16 IC10.31 IC10.38 IC10.51 IC10.61 IC10.83 IC10.94 IC10.107 IC10.120 IC10.130 IC11.2 IC11.26 IC11.40 IC11.41 IC11.43 IC11.46 IC11.47 IC11.50 IC11.52 IC11.54 IC11.56 IC11.58 IC11.60 IC11.62 IC11.64 IC12.2 IC12.5 IC13.2 IN1(R/S).1 IN2(L/M).1 IN_LEFT.1 IN_RIGHT.1 OUT1(R/S).1 OUT2(L/M).1 OUT_LEFT.3 OUT_RIGHT.3 PROG..4 R4.1 R5.1 R6.1 R13.1 R14.2 R15.2 R16.2 R17.2 R27.1 R42.1 R46.1 R47.1 R58.1 R60.1 R65.1 R69.2 R76.1 R77.2 R78.2 R83.1 R84.1 R85.1 R87.1 S1.1 S1.2 STAGE(LEFT).3 STAGE(LEFT).6 STAGE(RIGHT).3 STAGE(RIGHT).6 U4.2 U6.1 U7.2 U8.1 U12.8 VCA1(LEFT).3 VCA1(LEFT).6 VCA2(RIGHT).3 VCA2(RIGHT).6 X1.4 Z1.2
BOOT0: IC10.138 R78.1
BUSY: IC10.88 IC11.14
CHASIS: C15.1 C18.1 OUT1(R/S).G OUT2(L/M).G R17.1 R91.1 X1.P$1 X1.P$2
CS: IC10.123 IC11.13
CS_DAC1: IC10.134 R94.2
CS_DAC2: IC10.135 R95.2
CV_A_B: IC10.113 IC11.9 IC11.10
D_GND_TO_STAR: DIGITAL_VOLT.3 R15.1
DAC2_OUT1(OFFSET_VCA1): C99.1 IC9.3 R74.2 R76.2
DAC2_OUT2(OFFSET_VCA2): C39.1 IC9.5 R47.2 R75.2
DAC2_OUT3: IC3.4 R62.1
DAC2_OUT4: IC3.5 R70.1
DAC_OUT1: IC10.40 R57.1
DAC_OUT2: IC10.41 R55.1
DB0: IC10.141 IC11.16
DB1: IC10.142 IC11.17
DB2: IC10.1 IC11.18
DB3: IC10.2 IC11.19
DB4: IC10.3 IC11.20
DB5: IC10.4 IC11.21
DB6: IC10.5 IC11.22
DB7: IC10.58 IC11.24
DB8: IC10.59 IC11.25
DB9: IC10.60 IC11.27
DB10: IC10.63 IC11.28
DB11: IC10.64 IC11.29
DB12: IC10.65 IC11.30
DB13: IC10.66 IC11.31
DB14: IC10.67 IC11.32
DB15: IC10.68 IC11.33
DEBUG1: DEBUG1.P$1 IC10.21
DEBUG2: DEBUG2.P$1 IC10.115
DIN_DAC: IC10.29 R93.2 TP04.P$1
DISPLAY_GND_TO_STAR: DISPLAY1.4 DISPLAY2.4 R69.1
E+_OUT_STAGE_LEFT: IC7.6 IC7.7 STAGE(LEFT).2 TP02.P$1
E+_OUT_STAGE_RIGHT: IC14.6 IC14.7 STAGE(RIGHT).2 TP01.P$1
EC+_VCA1(LFT): IC9.1 R56.2 TP37.P$1 VCA1(LEFT).2
EC+_VCA2(RIGHT): IC9.7 R54.2 TP36.P$1 VCA2(RIGHT).2
FRST: IC10.122 IC11.15
L: IC4.3 IN_LEFT.5 IN_LEFT.6 K5.Q1
L/M_IN(VCA1_IN): C102.1 IC11.49 K5.P1
L/M_OUT(OUT_STAGE_LEFT): IC1.3 INSERT_AFTER_GAIN.4 K6.Q1
L/M_OUT(OUT_STAGE_LEFT)_BEFORE: C38.2 IC5.1 IC11.57 INSERT_AFTER_GAIN.3 R28.2
L/M_OUT(VCA1_OUT): C55.2 IC8.1 IC11.53 INSERT_BEFORE_GAIN.3 R48.2
L/M_OUT+: K3.S2 OUT_LEFT.7 OUT_LEFT.8
L/M_OUT-: K3.S1 OUT_LEFT.1 OUT_LEFT.2
LD1: IC10.46 LD1.2
LD2: IC10.137 LD2.2
LD3: IC10.75 LD3.2
LED1: IC6.3 J1.10 R85.2
LED2: IC6.2 J1.12
M: K5.S1 U4.5 U4.6
M1: K6.S1 U7.5 U7.6
N$1: C9.1 IN_RIGHT.2 K1.S1
N$2: C10.2 IN_RIGHT.3 K1.S2
N$3: C9.2 C10.1 C15.2
N$4: IC11.61
N$5: K6.P1 K7.S1 K8.Q1
N$6: LD1.1 R5.2
N$7: C17.2 IN_LEFT.3 K4.S2
N$8: K1.Q1 K2.Q1
N$9: C16.2 C17.1 C18.2
N$10: IC10.101 R19.1
N$11: K1.Q2 K2.Q2
N$12: LD2.1 R6.2
N$13: C16.1 IN_LEFT.2 K4.S1
N$14: LED1.1 R7.2
N$15: C71.1 IC10.71
N$16: LED3.1 R8.2
N$17: C72.1 IC10.106
N$18: IC4.1 IC4.2 U4.3 U6.3
N$19: K6.P2 K7.Q1 K8.S1
N$20: C80.2 IC10.32 IC10.33
N$21: IC6.7 R18.2 R24.2
N$22: IC6.8 R20.2 R25.2
N$23: IC6.11 R21.2 R26.2
N$24: IC6.10 R27.2
N$25: IC6.24 R77.1
N$26: LED8.1 R12.2
N$27: C88.2 C89.2 IC6.6
N$28: K3.Q1 K4.Q1
N$29: LED7.1 R11.2
N$30: LED6.1 R10.2
N$31: K3.Q2 K4.Q2
N$32: LED5.1 R9.2
N$33: IC16.1 IC16.2 U4.1 U6.2
N$34: LD3.1 R13.2
N$35: J1.1 T1.16
N$36: J1.2 T1.14
N$37: J1.3 T1.11
N$38: IC11.6 R14.1
N$39: IC11.34 R35.2
N$40: C42.1 IC11.44 IC11.45
N$41: C51.1 IC11.42
N$42: C52.1 IC11.36
N$43: IC1.6 IC1.7 U7.1 U8.2
N$44: C59.1 IC11.39
N$45: IC1.1 IC1.2 U7.3 U8.3
N$46: J1.6 T1.9
N$47: IC11.63
N$48: C38.1 IC5.2 R28.1 STAGE(LEFT).8
N$49: LED2.1 R33.2
N$50: J1.11 R84.2
N$51: LED4.1 R34.2
N$52: J1.9 R83.2
N$53: C37.1 IC5.6 R30.1 STAGE(RIGHT).8
N$54: C43.1 R32.2 STAGE(RIGHT).5
N$55: R36.2 STAGE(LEFT).1
N$56: IC2.2 R38.2
N$57: IC2.3 R41.2
N$58: IC2.4 R44.2
N$59: IC2.5 R64.2
N$60: IC3.2 R74.1
N$61: IC3.3 R75.1
N$62: IC7.5 R46.2 R73.1
N$63: IC9.2 R56.1 R57.2
N$64: C55.1 IC8.2 R48.1 VCA1(LEFT).8
N$65: R52.2 VCA1(LEFT).1
N$66: IC14.5 R58.2 R59.1
N$67: IC15.3 R60.2 R61.1
N$68: R37.2 STAGE(RIGHT).1
N$69: C40.2 IC6.4 Y3.1
N$70: C100.2 IC6.5 Y3.2
N$71: C102.2 R52.1
N$72: IC7.2 R62.2 R71.1
N$73: C47.1 R31.2 STAGE(LEFT).5
N$74: IC14.2 R70.2 R72.1
N$75: C56.1 IC8.6 R49.1 VCA2(RIGHT).8
N$76: -15V_OK.2 R97.2
N$77: C58.1 R51.2 VCA2(RIGHT).5
N$78: C67.2 R53.1
N$79: R53.2 VCA2(RIGHT).1
N$80: C61.1 R50.2 VCA1(LEFT).5
N$81: IC9.6 R54.1 R55.2
N$82: +15V_OK.2 R98.1
N$83: +3V3_OK.2 R99.1
N$84: +5V_OK.2 R100.1
N$85: +12V_OK.2 R101.1
N$86: J1.7 R29.2
N$87: J1.8 R88.2
N$88: R89.2 T1.12
N$89: R90.2 T1.15
N$90: C101.1 R29.1 R88.1 R89.1 R90.1
N$91: IC2.10 IC3.10 R92.1
N$92: C101.2 J1.MP1 J1.MP2 R91.2
N$93: IC2.8 IC3.8 R93.1
N$94: IC2.9 R94.1
N$95: IC3.9 R95.1
N$96: INSERT_BEFORE_GAIN.2 R37.1
N$97: INSERT_BEFORE_GAIN.4 R36.1
NEGATIVE_IN(L/M): IN2(L/M).3 K4.P1
NEGATIVE_IN(R/S): IN1(R/S).3 K1.P1
NEGATIVE_OUT(L/M): K3.P1 OUT2(L/M).3
NGATIVE_OUT(R/S): K2.P1 OUT1(R/S).3
NRST: C44.2 IC6.15 IC10.25 PROG..2 S1.3 S1.4
OS0: IC10.98 IC11.3
OS1: IC10.99 IC11.4
OS2: IC10.111 IC11.5
OUT1_DRIVER: K1.2 K2.2 R7.1 R33.1 U12.16
OUT2_DRIVER: K3.2 K4.2 R8.1 R34.1 U12.15
OUT3_DRIVER: K5.2 R9.1 U12.14
OUT4_DRIVER: K6.2 R10.1 U12.13
OUT5_DRIVER: K7.2 R11.1 U12.12
OUT6_DRIVER: K8.2 R12.1 U12.11
OUT_L/M: K8.P1 OUT_LEFT.4
OUT_R/S: K7.P1 OUT_RIGHT.4
PB12: IC10.73 TP05.P$1
PD10: IC10.79 TP08.P$1
PD11: IC10.80 TP09.P$1
PD12: IC10.81 TP10.P$1
POSITIVE_IN(L/M): IN2(L/M).2 K4.P2
POSITIVE_IN(R/S): IN1(R/S).2 K1.P2
POSITIVE_OUT(L/M): K3.P2 OUT2(L/M).2
POSITIVE_OUT(R/S): K2.P2 OUT1(R/S).2
R: IC16.3 IN_RIGHT.5 IN_RIGHT.6 K5.Q2
R/S_IN(VCA2_IN): C67.1 IC11.51 K5.P2
R/S_OUT(OUT_STAGE_RIGHT): IC1.5 INSERT_AFTER_GAIN.2 K6.Q2
R/S_OUT(OUT_STAGE_RIGHT)_BEFORE: C37.2 IC5.7 IC11.59 INSERT_AFTER_GAIN.1 R30.2
R/S_OUT(VCA2_OUT): C56.2 IC8.7 IC11.55 INSERT_BEFORE_GAIN.1 R49.2
R/S_OUT+: K2.S2 OUT_RIGHT.7 OUT_RIGHT.8
R/S_OUT-: K2.S1 OUT_RIGHT.1 OUT_RIGHT.2
RANGE: IC10.112 IC11.8
RD: IC10.116 IC11.12
RD_N: IC6.22 IC13.6 R82.1 T1.8
RD_P: IC6.23 IC13.1 R81.1 T1.6
RELAIS1: IC10.57 U12.1
RELAIS2: IC10.56 U12.2
RELAIS3: IC10.132 U12.3
RELAIS4: IC10.125 U12.4
RELAIS5: IC10.127 U12.5
RELAIS6: IC10.124 U12.6
RESET: IC10.87 IC11.11
RMII_CRS_DV: IC10.43 R26.1
RMII_MDC: IC6.13 IC10.27
RMII_MDIO: IC6.12 IC10.36 R22.2
RMII_REF_CLK: IC6.14 IC10.35 R23.1
RMII_RXD0: IC10.44 R25.1
RMII_RXD1: IC10.45 R24.1
RMII_TX_EN: IC6.16 IC10.126
RMII_TXD0: IC6.17 IC10.128
RMII_TXD1: IC6.18 IC10.74
S: K5.S2 U6.5 U6.6
S1: K6.S2 U8.5 U8.6
SCLK_DAC: IC10.69 R92.2 TP03.P$1
SWCLK: IC10.109 PROG..1
SWDIO: IC10.105 PROG..3
SYM1: R38.1 R40.2 VCA1(LEFT).4
SYM2: R41.1 R43.2 VCA2(RIGHT).4
SYM3: R44.1 R63.2 STAGE(LEFT).4
SYM4: R64.1 R66.2 STAGE(RIGHT).4
TD_N: IC6.20 IC13.4 R80.1 T1.3
TD_P: IC6.21 IC13.3 R79.1 T1.1
USART1_RX: DISPLAY2.2 IC10.76
USART1_TX: DISPLAY2.1 IC10.136
USART3_RX: IC10.77 TP06.P$1
USART3_TX: IC10.78 TP07.P$1
USART6_RX: DISPLAY1.2 IC10.97
USART6_TX: DISPLAY1.1 IC10.96
USB_ID: IC10.102
USB_N: IC10.103 IC12.3 X1.2
USB_OVERCURRENT: IC10.92
USB_P: IC10.104 IC12.6 X1.3
USB_POWERSWITCHON: IC10.91
USB_SOF: IC10.100
USB_VBUS: IC12.1 R19.2 X1.1
V+: ANALOG_VOLT_IN.1 ANALOG_VOLT_OUT.1 C3.1 C4.1 C6.1 C8.1 C12.1 C21.1 C25.1 C27.1 C29.1 C30.1 C45.1 C46.1 C48.1 C50.1 C54.1 C60.1 C62.1 C63.1 C95.1 C97.1 C104.1 IC1.8 IC4.8 IC5.8 IC7.8 IC8.8 IC9.8 IC14.8 IC15.8 IC16.8 IN_LEFT.7 IN_RIGHT.7 OUT_LEFT.6 OUT_RIGHT.6 R3.2 R67.2 R98.2 STAGE(LEFT).7 STAGE(RIGHT).7 U4.7 U6.7 U7.7 U8.7 VCA1(LEFT).7 VCA2(RIGHT).7
V-: ANALOG_VOLT_IN.2 ANALOG_VOLT_OUT.2 C1.1 C2.1 C5.1 C7.1 C11.1 C13.1 C20.1 C23.1 C26.1 C28.1 C35.1 C49.1 C53.1 C57.1 C68.1 C96.1 C98.1 IC1.4 IC4.4 IC5.4 IC7.4 IC8.4 IC9.4 IC14.4 IC15.4 IC16.4 IN_LEFT.4 IN_RIGHT.4 OUT_LEFT.5 OUT_RIGHT.5 R2.1 R31.1 R32.1 R40.1 R43.1 R50.1 R51.1 R63.1 R66.1 R97.1 U4.4 U6.4 U7.4 U8.4